# EAGLE board Logic Engine v0.2 (TPS62143) (EAGLE 6.5.0)
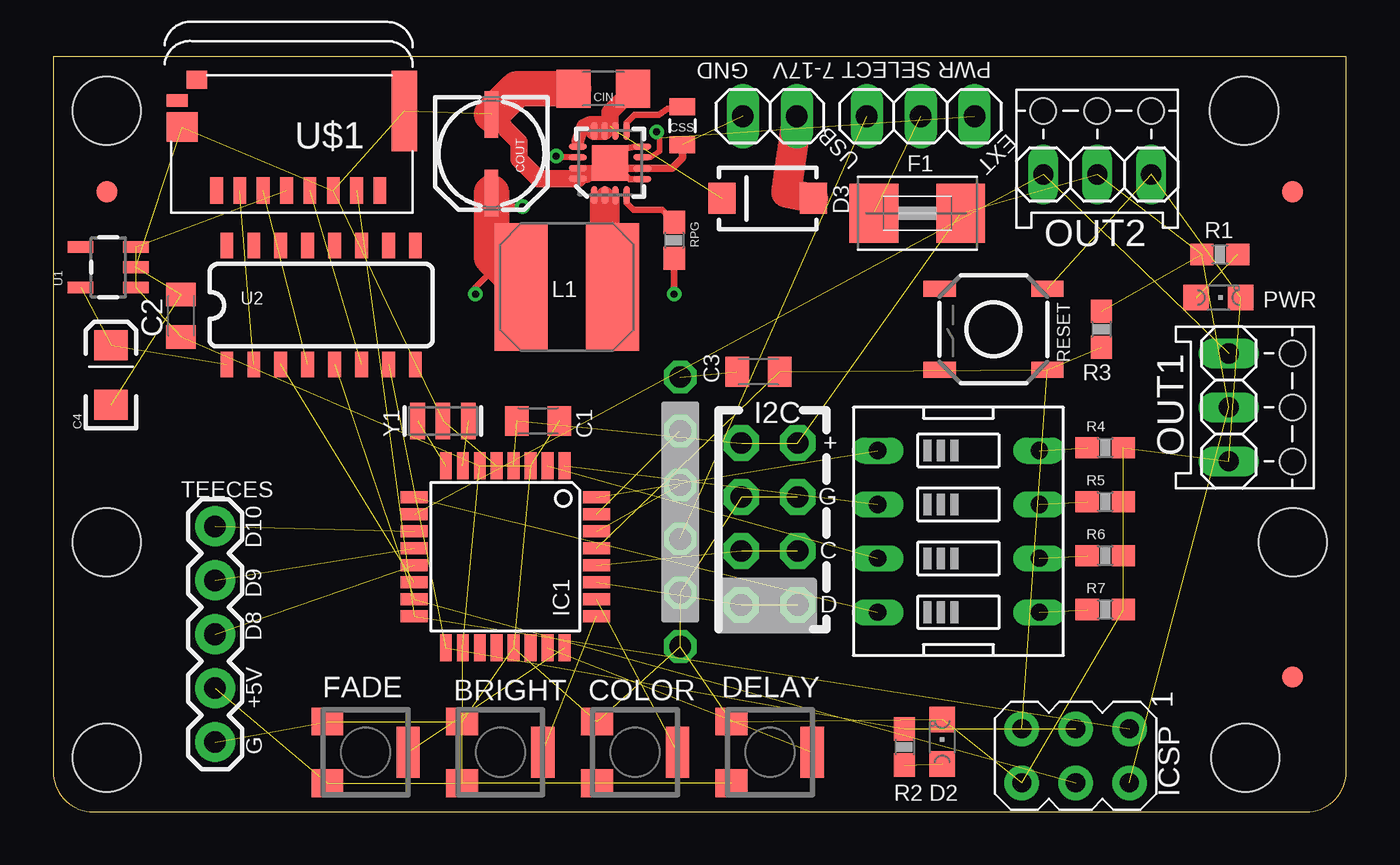
[diagram p0: board, top side]
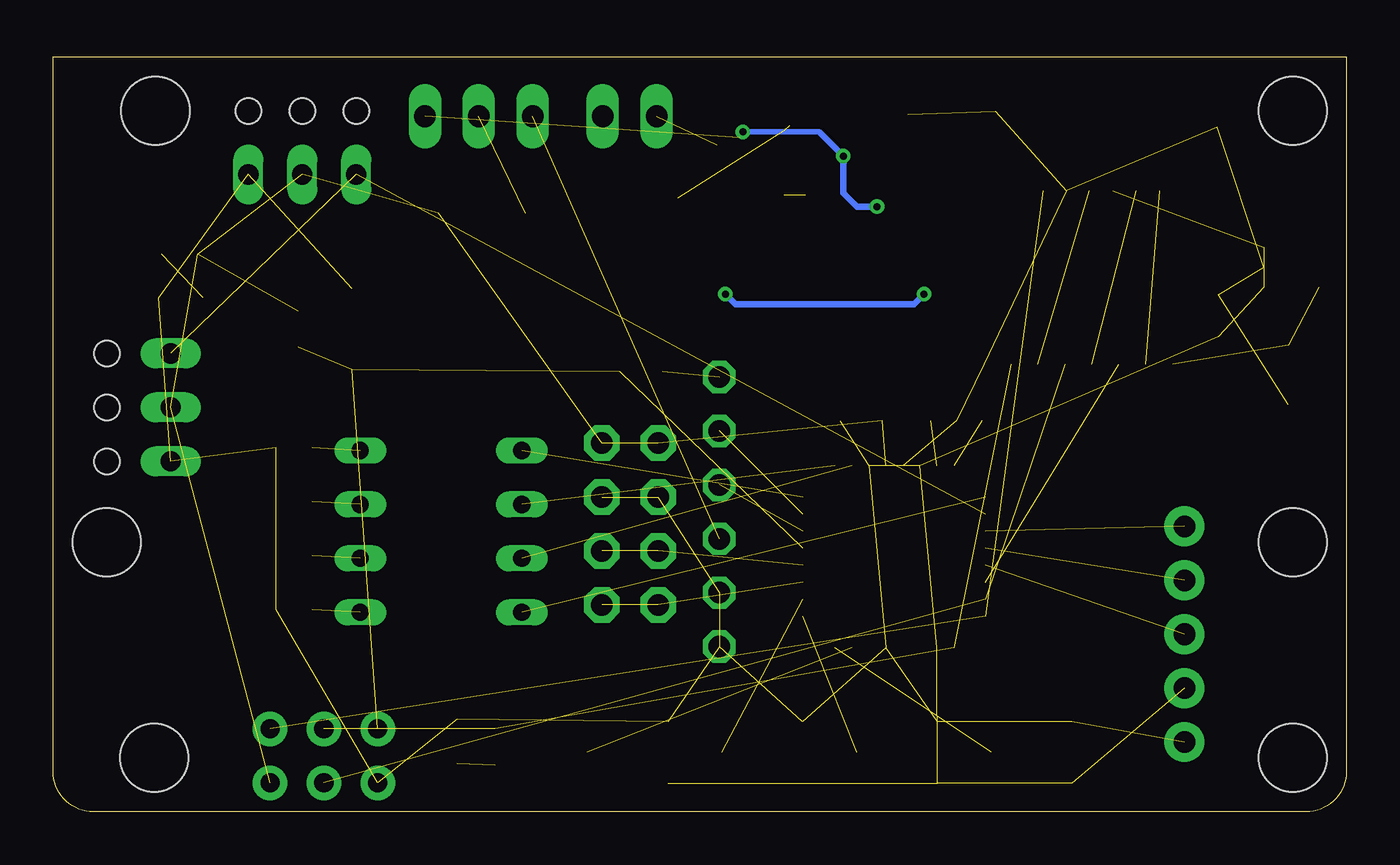
[diagram p1: board, bottom side, seen from below]

Size 60.96 x 35.56 mm. Coordinates in mm from the lower left corner, seen from the top.
Outline: 0,35.56 0,1.91 arc90 1.91,0 59.05,0 arc90 60.96,1.91 60.96,35.56 0,35.56
Copper layers (1*16): Top 0.0356mm / dielectric 1.5011mm / Bottom 0.0356mm
Design rules "LaenPCBOrder *": minimum track width 8mil, minimum drill 13mil, track to track 6mil, track to pad 6mil, pad to pad 6mil, via to via 12mil, smd to smd 6mil, copper to edge 15mil, drill to drill 6mil, minimum pad ring 7mil, minimum via ring 7mil, stop-mask expansion 4mil, vias tented up to drill 14mil, thermal gap 10mil
Net classes: 1 supply: width 0.305 mm, drill 0.152 mm, clearance 0.203 mm
Holes 3.2 mm at 58.42,12.7 2.54,12.7 56.2,2.54 2.54,2.54 56.13,33.02 2.54,33.02

## Footprints (pad centres in the part's own frame; a part is rotated, then mirrored left to right if it is on the bottom)
3364 = smd 1.3 x 1.5: 1 -1.45,-1.8; 3 1.45,-1.8 | smd 2.4 x 1.1: 2 0,2
C0805K = smd 1.1 x 1.4: 1 -1,0; 2 1,0
EIA3216 = smd 1.4 x 1.6: A 1.4,0; C -1.4,0
1206 = smd 1.6 x 1.8: 1 -1.4,0; 2 1.4,0
PANASONIC_C = smd 2.2 x 0.65: + 1.9,-0.2; - -1.8,-0.2
0805 = smd 0.8 x 1.2: 1 -0.9,0; 2 0.9,0
CHIPLED_0805 = smd 1.2 x 1.2: A 0,-1.05; C 0,1.05
SMA-DIODE = smd 1.27 x 1.47: A -2.15,0; C 2.15,0
1X02 = drill 1.016 long: 1 -1.27,0; 2 1.27,0
1812 = smd 2.286 x 2.794: 1 -2.046,0; 2 2.046,0
FIDUCIAL-1X2.5 = smd 1 x 1: 1 0,0
1X06-CLEAN = drill 1.016 octagon: 1 -6.35,0; 2 -3.81,0; 3 -1.27,0; 4 1.27,0; 5 3.81,0; 6 6.35,0
1X04-CB = drill 1.016 pad 1.676 octagon: 1 -3.81,0; 2 -1.27,0; 3 1.27,0; 4 3.81,0
TQFP32-08 = smd 1.27 x 0.559: 1 -4.293,2.8; 2 -4.293,2; 3 -4.293,1.2; 4 -4.293,0.4; 5 -4.293,-0.4; 6 -4.293,-1.2; 7 -4.293,-2; 8 -4.293,-2.8; 17 4.293,-2.8; 18 4.293,-2; 19 4.293,-1.2; 20 4.293,-0.4; 21 4.293,0.4; 22 4.293,1.2; 23 4.293,2; 24 4.293,2.8 | smd 0.559 x 1.27: 9 -2.8,-4.293; 10 -2,-4.293; 11 -1.2,-4.293; 12 -0.4,-4.293; 13 0.4,-4.293; 14 1.2,-4.293; 15 2,-4.293; 16 2.8,-4.293; 25 2.8,4.293; 26 2,4.293; 27 1.2,4.293; 28 0.4,4.293; 29 -0.4,4.293; 30 -1.2,4.293; 31 -2,4.293; 32 -2.8,4.293
AVRISP = drill 0.9 pad 1.626: 1 -1.27,2.54; 2 1.27,2.54; 3 -1.27,0; 4 1.27,0; 5 -1.27,-2.54; 6 1.27,-2.54
SRN6045 = smd 2.5 x 6: 1 -2.175,-0.175; 2 2.125,-0.175
MDF7_1X03 = drill 0.95 long: 1 -2.54,0; 2 0,0; 3 2.54,0 | hole 1.2: 0,3; 2.54,3; -2.54,3
1X03 = drill 1.016 long: 1 -2.54,0; 2 0,0; 3 2.54,0
0603-RES = smd 1.1 x 1: 1 -0.85,0; 2 0.85,0
TACTILE_SWITCH_SMD = smd 1.524 x 0.762: 1 -2.54,1.905; 2 2.54,1.905; 3 -2.54,-1.905; 4 2.54,-1.905
EDG-04 = drill 0.813 long: 1 -3.81,-3.81; 2 -1.27,-3.81; 3 1.27,-3.81; 4 3.81,-3.81; 5 3.81,3.81; 6 1.27,3.81; 7 -1.27,3.81; 8 -3.81,3.81
1X05 = drill 1.016 pad 1.88: 1 0,0; 2 2.54,0; 3 5.08,0; 4 7.62,0; 5 10.16,0
SOT23-5 = smd 0.55 x 1.2: 1 -0.95,-1.3; 2 0,-1.3; 3 0.95,-1.3; 4 0.95,1.3; 5 -0.95,1.3
SO016 = smd 0.6 x 1.2: 1 -4.445,-2.8; 2 -3.175,-2.8; 3 -1.905,-2.8; 4 -0.635,-2.8; 5 0.635,-2.8; 6 1.905,-2.8; 7 3.175,-2.8; 8 4.445,-2.8; 9 4.445,2.8; 10 3.175,2.8; 11 1.905,2.8; 12 0.635,2.8; 13 -0.635,2.8; 14 -1.905,2.8; 15 -3.175,2.8; 16 -4.445,2.8
QFN16-3X3MM_1:1_V03 = smd 0.85 x 0.28: 1 -1.524,0.75; 2 -1.524,0.253; 3 -1.529,-0.25; 4 -1.527,-0.774; 9 1.503,-0.77; 10 1.498,-0.245; 11 1.498,0.255; 12 1.495,0.755 | smd 0.28 x 0.85: 5 -0.765,-1.513; 6 -0.265,-1.513; 7 0.263,-1.513; 8 0.763,-1.513; 13 0.758,1.518; 14 0.258,1.518; 15 -0.247,1.518; 16 -0.742,1.518 | smd 1.68 x 1.68: EXT -0.009,0.008
MICROSD_SMALL = smd 0.6 x 1.25: 1 3.85,-0.05; 2 2.75,-0.05; 3 1.65,-0.05; 4 0.55,-0.05; 5 -0.55,-0.05; 6 -1.65,-0.05; 7 -2.75,-0.05; 8 -3.85,-0.05 | smd 0.95 x 0.85: CD1 4.775,-5.275 | smd 1 x 0.6: CD2 5.7,-4.3 | smd 1.2 x 3.8: MT1 -5,-3.8 | smd 1.45 x 1.4: MT2 5.475,-3.05
RESONATOR-SMD = smd 0.7 x 1.7: 1 -1.2,0; 2 0,0; 3 1.2,0

## Placement (x,y rotation side)
BRIGHT  [3364]  21.08,2.79 270 top
C1  0.1uF  [C0805K]  22.86,18.41 0 top
C2  0.1uF  [C0805K]  6.03,23.37 90 top
C3  0.1uF  [C0805K]  33.24,20.73 0 top
C4  10uF  [EIA3216]  2.73,20.57 90 top
CIN  [1206]  25.94,34.07 180 top
COLOR  [3364]  27.43,2.79 270 top
COUT  [PANASONIC_C]  20.86,31.05 270 top
CSS  [0805]  29.66,32.32 270 top
D2  [CHIPLED_0805]  41.91,3.3 0 top
D3  BA340LA  [SMA-DIODE]  33.68,28.9 180 top
DELAY  [3364]  33.78,2.79 270 top
EXT_PWR  [1X02]  33.78,32.77 0 top
F1  [1812]  40.74,28.19 180 top
FADE  [3364]  14.73,2.79 270 top
FID1  FIDUCIAL1X2.5  [FIDUCIAL-1X2.5]  2.54,29.21 0 top
FID2  FIDUCIAL1X2.5  [FIDUCIAL-1X2.5]  58.42,6.35 0 top
FID3  FIDUCIAL1X2.5  [FIDUCIAL-1X2.5]  58.42,29.21 0 top
FTDI  GRN TX RX 5V G BLK  [1X06-CLEAN]  29.56,14.13 90 top
I2C  [1X04-CB]  32.44,13.56 90 top
I2C1  [1X04-CB]  35.09,13.56 90 top
IC1  MEGA328P  [TQFP32-08]  21.31,12.01 270 top
ICSP  AVRISP-6  [AVRISP]  48.2,2.64 270 top
L1  33uH  [SRN6045]  24.19,24.54 180 top
OUT1  [MDF7_1X03]  55.42,19.05 270 top
OUT2  [MDF7_1X03]  49.21,30.02 0 top
PWR  [CHIPLED_0805]  54.93,24.23 270 top
PWR_SEL1  [1X03]  40.89,32.77 180 top
R1  1K  [0603-RES]  54.99,26.26 0 top
R2  1K  [0603-RES]  40.13,3.05 270 top
R3  10K  [0603-RES]  49.4,22.73 270 top
R4  10K  [0603-RES]  49.59,17.14 0 top
R5  10K  [0603-RES]  49.59,14.61 0 top
R6  10K  [0603-RES]  49.59,12.06 0 top
R7  10K  [0603-RES]  49.59,9.53 0 top
RESET  [TACTILE_SWITCH_SMD]  44.32,22.73 180 top
RPG  [0603-RES]  29.27,26.92 270 top
SW1  [EDG-04]  42.67,13.21 270 top
TEECES  [1X05]  7.64,3.28 90 top
U1  V_REG_LDOSMD  [SOT23-5]  2.6,25.65 90 top
U2  HEX_CONVERTER  [SO016]  12.64,23.88 0 top
U3  TPS62143  [QFN16-3X3MM_1:1_V03]  26.26,30.58 90 top
U$1  MICROSD  [MICROSD_SMALL]  11.56,29.21 180 top
Y1  16MHz  [RESONATOR-SMD]  18.37,18.41 180 top

## Library data of the parts
BRIGHT COLOR DELAY FADE OUT1 OUT2 U3 U$1 = rseries
C1-C3 D2 F1 ICSP PWR = adafruit
C4 = SparkFun-Capacitors; PROD_ID: CAP-00811
CIN COUT CSS = SparkFun-Capacitors
D3 = SparkFun-DiscreteSemi; PROD_ID: DIO-09886
EXT_PWR PWR_SEL1 = pinhead
FID1-FID3 = SparkFun-Aesthetics
FTDI I2C I2C1 = carduino
IC1 = avr-7
L1 = SparkFun-Passives; PROD_ID: NDUC-11627
R1-R7 RPG = SparkFun-Resistors
RESET = SparkFun-Electromechanical
SW1 = special
TEECES = SparkFun-Connectors
U1 = SparkFun-PowerIC
U2 = SparkFun-DigitalIC
Y1 = SparkFun-FreqCtrl; PROD_ID: XTAL-08900

## Nets
+5V [supply]: BRIGHT.3 C1.1 C2.1 COLOR.3 DELAY.3 F1.1 FADE.3 I2C1.4 I2C.4 IC1.4 IC1.6 IC1.18 ICSP.2 OUT1.2 OUT2.2 R1.1 R3.1 TEECES.2 U1.1 U1.3 U$1.4
ANALOG0: DELAY.2 IC1.23
ANALOG1: FADE.2 IC1.24
ANALOG2: BRIGHT.2 IC1.25
ANALOG3: COLOR.2 IC1.26
ANALOG4: I2C1.1 I2C.1 IC1.27
ANALOG5: I2C1.2 I2C.2 IC1.28
AREF: IC1.20
DIGITAL2: IC1.32 SW1.1
DIGITAL3: IC1.1 SW1.2
DIGITAL4: IC1.2 SW1.3
DIGITAL5: IC1.9 SW1.4
DIGITAL6: IC1.10 OUT1.1 OUT2.1
DIGITAL7: IC1.11 TEECES.5
DIGITAL8: IC1.12 TEECES.4
DIGITAL9: IC1.13 TEECES.3
DIGITAL10: IC1.14 U2.3
GND [supply]: BRIGHT.1 C1.2 C2.2 C4.C CIN.2 COLOR.1 COUT.- CSS.2 D2.C DELAY.1 EXT_PWR.1 FADE.1 FTDI.1 FTDI.2 I2C1.3 I2C.3 IC1.3 IC1.5 IC1.21 ICSP.6 OUT1.3 OUT2.3 PWR.C R4.2 R5.2 R6.2 R7.2 RESET.3 TEECES.1 U1.2 U2.8 U3.5 U3.6 U3.8 U3.15 U3.16 U3.EXT U$1.6 U$1.MT1 U$1.MT2 Y1.2
MISO: IC1.16 ICSP.1 U$1.7
MOSI: IC1.15 ICSP.4 U2.5
N$1: IC1.7 Y1.1
N$2: IC1.8 Y1.3
N$3: CIN.1 D3.C U3.10 U3.11 U3.12 U3.13
N$4: D2.A R2.2
N$5 [supply]: PWR.A R1.2
N$6: COUT.+ L1.2 PWR_SEL1.1 RPG.2 U3.7 U3.14
N$7: RPG.1 U3.4
N$10: F1.2 PWR_SEL1.2
N$11: D3.A EXT_PWR.2
N$12: R4.1 SW1.8
N$13: R5.1 SW1.7
N$14: R6.1 SW1.6
N$15: R7.1 SW1.5
N$16: U2.4 U$1.3
N$17: U2.6 U$1.5
N$18: U2.2 U$1.2
N$19 [supply]: C4.A U1.5 U2.1
N$20: CSS.1 U3.9
N$22: L1.1 U3.1 U3.2 U3.3
RST: C3.2 IC1.29 ICSP.5 R3.2 RESET.1
RTS#: C3.1 FTDI.6
RXD: FTDI.4 IC1.30
SCK: IC1.17 ICSP.3 R2.1 U2.7
TXD: FTDI.5 IC1.31
USB_5V [supply]: FTDI.3 PWR_SEL1.3

## Tracks (layer width: path | path; a pad name or v marks a point on that pad's centre or on a via)
+5V  (20 unrouted)
ANALOG0  (1 unrouted)
ANALOG1  (1 unrouted)
ANALOG2  (1 unrouted)
ANALOG3  (1 unrouted)
ANALOG4  (2 unrouted)
ANALOG5  (2 unrouted)
DIGITAL2  (1 unrouted)
DIGITAL3  (1 unrouted)
DIGITAL4  (1 unrouted)
DIGITAL5  (1 unrouted)
DIGITAL6  (2 unrouted)
DIGITAL7  (1 unrouted)
DIGITAL8  (1 unrouted)
DIGITAL9  (1 unrouted)
DIGITAL10  (1 unrouted)
GND  (32 unrouted)
  Top 0.305: U3.15 26.01,30.33 U3.EXT | U3.16 24.85,29.94 | 25.77,30.57 U3.EXT | 26.51,30.31 U3.EXT | U3.5 27.17,29.81 26.67,30.31 | U3.8 27.4,31.34 27.18,31.29 26.92,31.24 26.8,31.11 U3.EXT
  Top 0.356: 25.15,29.94 25.77,30.57 | CSS.2 29.66,30.8 29.17,30.31 U3.6 26.67,30.31 26.51,30.31
  Top 0.61: 24.85,29.94 25.15,29.94
  Top 0.813: U3.16 22.87,29.83 21.97,30.73 21.97,31.54 COUT.-
  Top 1.676: COUT.- 21.88,34.07 CIN.2
MISO  (2 unrouted)
MOSI  (2 unrouted)
N$1  (1 unrouted)
N$2  (1 unrouted)
N$3  (2 unrouted)
  Top 0.305: 26.26,32.33 U3.11 | 27.34,34.04 CIN.1 | U3.13 24.74,31.6
  Top 0.61: 24.74,31.6 24.99,32.32 25.3,32.48 25.94,32.48 26.26,32.64
  Top 0.813: 26.26,32.33 26.26,32.64 26.26,32.96 27.34,34.04 | U3.12 U3.11
  Top 1.27: CIN.1
N$4  (1 unrouted)
N$5  (1 unrouted)
N$6  (via drill 0.33)  (1 unrouted)
  Top 0.254: U3.7 28.17,30.84 28.57,31.11 28.57,31.75 v28.45,32.03
  Top 0.292: U3.14 23.98,30.83
  Top 0.305: 23.98,30.83 v23.72,30.89 | v22.13,28.51 20.82,28.51 20.66,28.35 | RPG.2 v29.27,24.38 | v19.91,24.38 19.91,24.7 21,25.79
  Top 1.676: COUT.+ 20.66,28.35 20.66,26.13 21,25.79 L1.2
  Bottom 0.254: v28.45,32.03 24.85,32.03 v23.72,30.89
  Bottom 0.305: v23.72,30.89 23.72,29.15 23.08,28.51 v22.13,28.51 | v29.27,24.38 28.8,23.91 20.38,23.91 v19.91,24.38
N$7
  Top 0.305: U3.4 27.03,28.69 27.37,28.35 28.7,28.35 RPG.1
N$10  (1 unrouted)
N$11
  Top 1.422: EXT_PWR.2 34.54,29.17 D3.A
N$12  (1 unrouted)
N$13  (1 unrouted)
N$14  (1 unrouted)
N$15  (1 unrouted)
N$16  (1 unrouted)
N$17  (1 unrouted)
N$18  (1 unrouted)
N$19  (2 unrouted)
N$20
  Top 0.305: U3.9 27.03,32.46 27.41,32.84 28.56,32.84 28.96,33.12 29.33,33.12 CSS.1
N$22  (2 unrouted)
  Top 0.406: 26,24.72 L1.1 26,25.08 | U3.3 26.51,27.31 26.57,27.24 | U3.1 25.51,27.36 25.62,27.24
  Top 0.813: U3.2 26,25.08
RST  (4 unrouted)
RTS#  (1 unrouted)
RXD  (1 unrouted)
SCK  (3 unrouted)
TXD  (1 unrouted)
USB_5V  (1 unrouted)

## Text on the board
tPlace: RSERIES | GND | 7-17V | PWR SELECT | EXT | USB | D10 | D9 | D8 | 2013-09-10 | +5V | G
_tsilk: + | G | C | D